# Allegro board CP506.brd
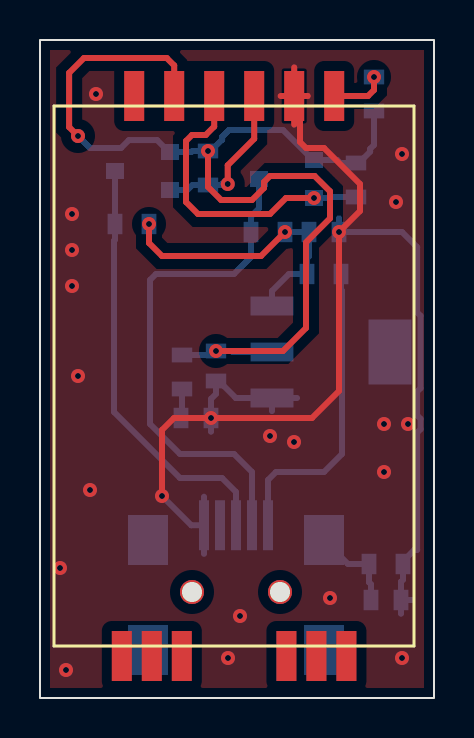
[diagram p0: board, top side]
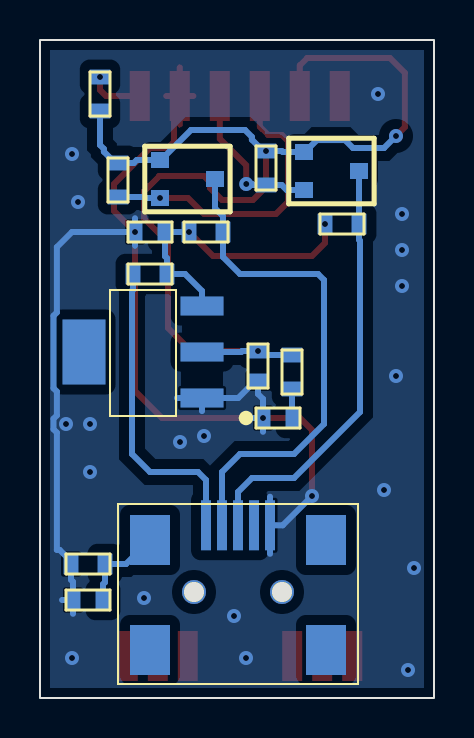
[diagram p1: board, bottom side, seen from below]

Outline 19.7 x 32.9 mm; copper layers: TOP, BOTTOM. Coordinates in mm from the lower left corner of the outline.
Outline path: rectangle 0,0 19.7,32.9

## Design rules (mm)
constraint set DEFAULT: min track width 0.3

## Placement (name value [footprint] x y rotation side)
C1  10uF  [CAP_SMD_0603]  8.8 16.6 270 bottom
C2  10uF  [CAP_SMD_0603]  14.2 23.3 0 bottom
C3  4.7nF  [CAP_SMD_0603]  17.3 4.9 0 bottom
D1  POWER LED  [LED_SMD_0603]  7.8 14 180 bottom
L1  INDUCTOR  [RES_SMD_0603]  14.2 21.2 180 bottom
Q2  2302  [SOT23]  6.5 27.3 90 bottom
Q3  2302  [SOT23]  13.7 26.9 90 bottom
R1  10K  [RES_SMD_0603]  16.7 30.2 90 bottom
R2  330R  [RES_SMD_0603]  7.1 16.3 270 bottom
R3  1M  [RES_SMD_0603]  17.3 6.7 0 bottom
R14  4K7  [RES_SMD_0603]  8.4 26.5 270 bottom
R15  4K7  [RES_SMD_0603]  4.6 23.7 180 bottom
R16  4K7  [RES_SMD_0603]  15.8 25.9 270 bottom
R17  4K7  [RES_SMD_0603]  11.4 23.3 180 bottom
U1  -  [WIFI_CP506]  18.7 29.6 270 top
U2  AMS1117  [SOT223]  14.5 17.2 90 bottom
U3  MiniUSB  [MINI_USB]  9.8 5.3 180 bottom

## Library data of the parts
C1-C3 = CAPACITOR NON-POL
D1 = LED
L1 = INDUCTOR
Q2 Q3 = IRF1010E/TO_0
R1-R3 R14-R17 = R
U1 = WIFI_CP506
U2 = ASM1117
U3 = Mini USB

## Footprints (pads in the part's own frame, mm; a bottom-side part is the same pattern mirrored in y, then rotated)
CAP_SMD_0603
  rect 0.74x1.02 smd: 1(-0.75,0) 2(0.75,0)
LED_SMD_0603
  rect 0.74x1.02 smd: 1(-0.75,0) 2(0.75,0)
MINI_USB
  rect 0.5x2.5 smd: 1(-1.6,3.336) 2(-0.8,3.336) 3(0,3.336) 4(0.8,3.336) 5(1.6,3.336)
  rect 2x2.5 smd: 6(4.4,2.6) 7(-4.4,2.6) 8(-4.4,-2.9) 9(4.4,-2.9)
  round 1.2 hole 1: 10(2.2,0) 11(-2.2,0)
RES_SMD_0603
  rect 0.74x1.02 smd: 1(-0.85,0) 2(0.85,0)
SOT23
  rect 0.8x0.9 smd: 1(0,0) 2(-1.9,0) 3(-0.95,-2.75)
SOT223
  rect 3.25x2.15 smd: (0.1,3)
  rect 0.95x2.15 smd: 1(-2.201,-2.901) 2(0.099,-2.901) 3(2.399,-2.901)
WIFI_CP506
  rect 2.5x1 smd: 1(-0.5,-3.99) 2(-0.5,-5.99) 3(-0.5,-7.99) 4(-0.5,-9.99) 5(-0.5,-11.99) 6(-0.5,-13.99) 7(27.5,-14.61) 8(27.5,-13.11) 9(27.5,-11.61) 10(27.5,-6.38) 11(27.5,-4.88) 12(27.5,-3.38)

## Nets
3V3: C1.1 Q2.1 Q3.1 R1.1 R2.1 R14.1 R16.1 U1.5 U2.2(VOUT)
3V_D+: Q2.2(S) R14.2 U1.3
3V_D-: Q3.2(S) R16.2 U1.4
5V: C2.1 L1.2 R15.1 R17.1 U2.3
5V_D+: Q2.3 R15.2 U3.3
5V_D-: Q3.3 R17.2 U3.2
GND: C1.2 C2.2 C3.2 D1.1(CATHODE) R3.2 U1.2 U2.1 U3.5
N46399: R1.2 U1.1
N51184: L1.1 U3.1
N51260: C3.1 R3.1 U3.7
N462811: D1.2 R2.2

Pads without a net: U1 6 7 8 9 10 11 12; U3 4 6 8 9 10 11

## Via types
v1: diameter 0.7, hole 0.3, TOP to BOTTOM, 30 vias

## Routing (per net, layer and track width the routed paths; a pad name or vN(x,y) marks a point on that pad's centre or on a via; arc(x,y) is an arc through that point)
3V3: length 55.5
  TOP w0.3: v1(8.4,27.35) 8.4,25.56 9.06,24.9 10.6,24.9 11.2,25.5 11.2,25.8 11.5,26.1 13.73,26.1 14.5,25.33 14.5,23.98 13.3,22.78 13.3,18.5 12.15,17.35 v1(8.8,17.35) ; v1(1.9,28.1) 1.46,28.54 1.46,31.26 2.2,32 6.34,32 6.71,31.63 U1.5
  BOTTOM w0.3: v1(1.9,28.1) 2.5,27.5 4.05,27.5 4.45,27.9 5.85,27.9 6.45,27.3 Q2.1 7.56,27.3 7.61,27.35 v1(8.4,27.35) 8.54,27.35 9.11,27.92 9.11,28.06 9.45,28.4 12.15,28.4 13.65,26.9 Q3.1 14.86,26.9 15.01,26.75 R16.1 15.94,26.75 16.51,27.32 16.51,27.46 16.7,27.65 R1.1 ; R2.1 8.6,17.15 v1(8.8,17.35) 9.59,17.35 9.64,17.3 U2.2
3V_D+: length 8
  TOP w0.3: v1(9.39,25.7) 9.39,26.64 10.71,27.96 U1.3
  BOTTOM w0.3: Q2.2 7.36,25.4 7.61,25.65 R14.2 9.05,25.65 9.1,25.7 v1(9.39,25.7)
3V_D-: length 15.4
  TOP w0.3: v1(13.7,25) 12.3,25 11.5,24.2 7.9,24.2 7.3,24.8 7.3,27.85 7.6,28.15 8.29,28.15 8.71,28.57 U1.4
  BOTTOM w0.3: v1(13.7,25) 14.43,25 14.48,25.05 R16.2
5V: length 14.7
  TOP w0.3: v1(5.45,23.7) 5.45,22.75 6.1,22.1 11.05,22.1 v1(12.25,23.3)
  BOTTOM w0.3: U2.3 11.6,20.35 12.45,21.2 L1.2 13.35,21.99 13.45,22.09 C2.1 v1(12.25,23.3)
5V_D+: length 21.5
  BOTTOM w0.3: Q2.3 R15.2 3.75,22.91 3.7,22.86 3.7,14.3 7,11 9.1,11 9.8,10.3 U3.3
5V_D-: length 25.5
  BOTTOM w0.3: Q3.3 10.95,24.49 10.55,24.09 R17.2 10.55,22.05 9.7,21.2 5.8,21.2 5.5,20.9 5.5,13.7 7,12.2 9.7,12.2 10.6,11.3 U3.2
GND: length 73.2
  TOP w0.3: U1.2 13.39,30.1 ; U1.2 12.03,30.1 ; U1.2 12.71,31.53 ; U1.2 13,29.81 13,27.8 13.3,27.5 14.2,27.5 16,25.7 16,24.35 v1(14.95,23.3) 14.95,15.35 13.6,14 v1(8.55,14) 6.7,14 6.1,13.4 v1(6.1,10.1) ; U1.2 12.71,28.67
  BOTTOM w0.3: v1(6.1,10.1) 7.56,8.64 U3.5 ; C3.2 18.6,4.9 ; C3.2 18.05,4.21 ; C3.2 18.05,5.81 18.15,5.91 R3.2 18.15,6.84 18.72,7.41 18.86,7.41 18.86,13.27 19.03,13.44 19.03,13.96 18.86,14.13 18.86,15.32 19.03,15.49 19.03,19.11 18.86,19.28 18.86,22.54 18.1,23.3 v1(14.95,23.3) ; v1(8.55,14) 9.1,14 ; v1(8.55,14) 8.55,14.95 8.8,15.2 C1.2 8.94,15.85 9.79,15 U2.1 ; v1(8.55,14) 8.55,13.31 ; U2.1 12.85,15 ; U2.1 11.6,14.35 ; 14.95,22.61 v1(14.95,23.3) ; v1(14.95,23.3) 14.95,23.99 ; 8.2,7.21 U3.5 ; U3.5 8.2,10.06
  vias: v1(1,6.5) v1(1.3,1.4) v1(1.6,24.2) v1(1.6,22.4) v1(1.6,20.6) v1(1.9,16.1) v1(2.5,10.4) v1(2.8,30.2) v1(9.4,2) v1(10,4.1) v1(11.5,13.1) v1(12.7,12.8) v1(14.5,5) v1(17.2,13.7) v1(17.2,11.3) v1(17.8,24.8) v1(18.1,27.2) v1(18.1,2) v1(18.4,13.7)
N46399: length 2.8
  TOP w0.3: U1.1 16.4,30.1 16.7,30.4 v1(16.7,31.05)
N51184: length 15.5
  BOTTOM w0.3: U3.1 11.4,10.9 11.8,11.3 14.2,11.3 15.1,12.2 15.1,20.36 15.05,20.41 L1.1
N51260: length 4.6
  BOTTOM w0.3: C3.1 16.55,5.69 16.45,5.79 R3.1 15.4,6.7 U3.7
N462811: length 1.5
  BOTTOM w0.3: D1.2 7.1,14.05 R2.2

## Copper pours and planes (outline as drawn; the poured copper is in the pictures)
GND on TOP: 0.5,0.5 0.5,32.4 19.2,32.4 19.2,0.5 ; 2 cut-outs
GND on BOTTOM: 0.5,0.5 0.5,32.4 19.2,32.4 19.2,0.5 ; 5 cut-outs
